# EAGLE board mach.job (EAGLE 6.1)
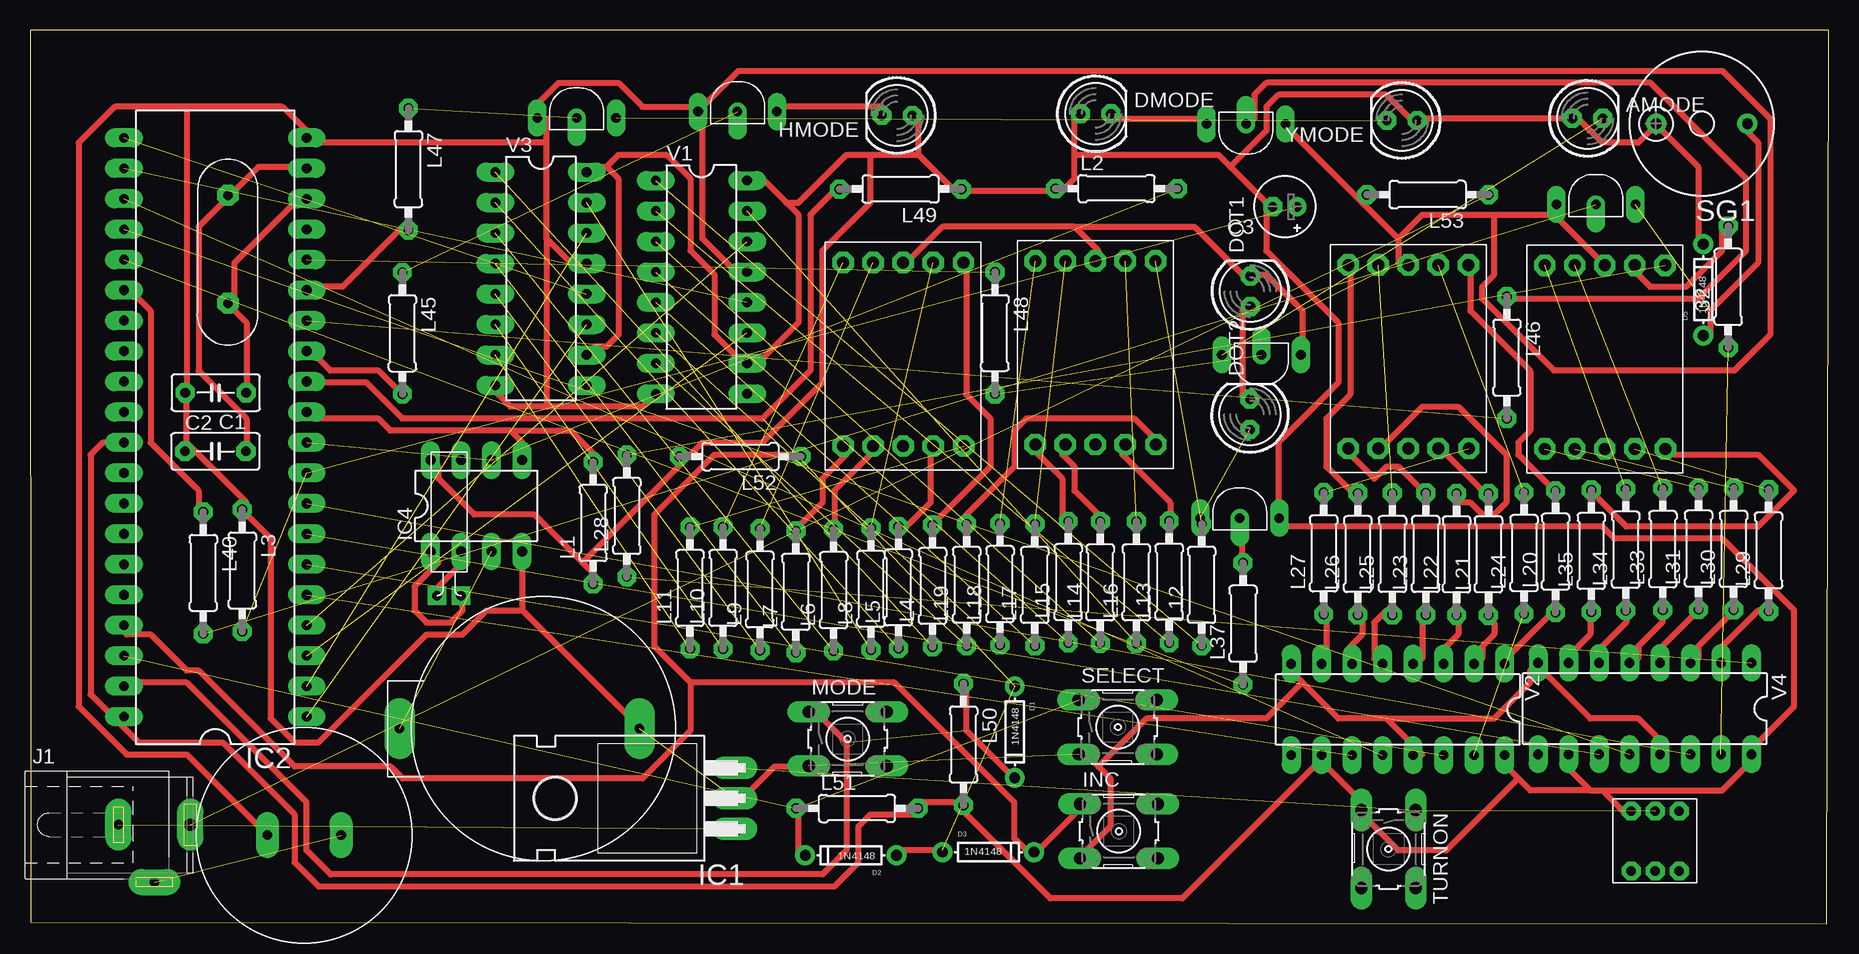
[diagram p0: board, top side]

Size 149.96 x 74.51 mm. Coordinates in mm from the lower left corner, seen from the top.
Outline: 0.05,0.1 149.75,0 149.96,74.49 0,74.51 0.05,0.1
Copper layers (1*16): Top 0.035mm / dielectric 1.5mm / Bottom 0.035mm
Design rules: minimum track width 20mil, minimum drill 20mil, track to track 10mil, track to pad 15mil, pad to pad 15mil, via to via 15mil, smd to smd 8mil, copper to edge 40mil, drill to drill 20mil, minimum pad ring 15mil, minimum via ring 8mil, stop-mask expansion 10mil, vias tented up to drill 0mil, thermal gap 40mil

## Footprints (pad centres in the part's own frame; a part is rotated, then mirrored left to right if it is on the bottom)
7SEG13X19 = drill 1 pad 1.778 octagon: P$1 5.175,7.19; P$2 2.65,7.19; P$3 0.15,7.19; P$4 -2.35,7.19; P$5 -4.85,7.19; P$6 5.201,-8.11; P$7 2.65,-8.11; P$8 0.15,-8.11; P$9 -2.35,-8.11; P$10 -4.85,-8.11
LED5MM = drill 0.813 octagon: A -1.27,0; K 1.27,0
C5B3 = drill 0.813 pad 1.6 octagon: 1 -2.54,0; 2 2.54,0
E2-5 = drill 0.813 pad 1.27: + -1.016,0 | drill 0.813 pad 1.27 octagon: - 1.016,0
DO-1N4148 = drill 0.9: A -3.81,0; C 3.81,0
TO220H = drill 1.118 long: 1 -2.54,-10.16; 2 0,-10.16; 3 2.54,-10.16 | hole 3.302: 0,4.826
DIL40 = drill 0.813 long: 1 -24.13,-7.62; 2 -21.59,-7.62; 3 -19.05,-7.62; 4 -16.51,-7.62; 5 -13.97,-7.62; 6 -11.43,-7.62; 7 -8.89,-7.62; 8 -6.35,-7.62; 9 -3.81,-7.62; 10 -1.27,-7.62; 11 1.27,-7.62; 12 3.81,-7.62; 13 6.35,-7.62; 14 8.89,-7.62; 15 11.43,-7.62; 16 13.97,-7.62; 17 16.51,-7.62; 18 19.05,-7.62; 19 21.59,-7.62; 20 24.13,-7.62; 21 24.13,7.62; 22 21.59,7.62; 23 19.05,7.62; 24 16.51,7.62; 25 13.97,7.62; 26 11.43,7.62; 27 8.89,7.62; 28 6.35,7.62; 29 3.81,7.62; 30 1.27,7.62; 31 -1.27,7.62; 32 -3.81,7.62; 33 -6.35,7.62; 34 -8.89,7.62; 35 -11.43,7.62; 36 -13.97,7.62; 37 -16.51,7.62; 38 -19.05,7.62; 39 -21.59,7.62; 40 -24.13,7.62
DIL08 = drill 0.813 long: 1 -3.81,-3.81; 2 -1.27,-3.81; 3 1.27,-3.81; 4 3.81,-3.81; 5 3.81,3.81; 6 1.27,3.81; 7 -1.27,3.81; 8 -3.81,3.81
B3F-10XX = drill 1.016 long: 1 -3.251,2.261; 2 3.251,2.261; 3 -3.251,-2.261; 4 3.251,-2.261
SPC4077 = drill 0.8 pad 2.184 long: 1 -3,0; 2 0,-4.8 | drill 1 pad 2.184 long: 3 3,0
0207/10 = drill 0.813 octagon: 1 -5.08,0; 2 5.08,0
BMT1205XH7.5 = drill 0.9 pad 1.5: + 3.8,0; - -3.8,0
PINCMOS3VCR23 = drill 0.8 pad 2.54 long: P$1 0,8; P$2 0,-12
XTAL32KHZMINI = drill 0.8 square: P$1 0.5,-12; P$2 2.5,-12
XTAL12MHZ = drill 0.8 pad 1.778 octagon: P$1 9.5,-2.5; P$2 0.5,-2.5
PUSKLOCKBUTTON = drill 0.8 pad 1.422 octagon: P$1 5.04,0; P$2 3.04,0; P$3 1.04,0; P$4 1.04,-5; P$5 3.04,-5; P$6 5.04,-5
C9014 = drill 0.8 long: P$1 -1.04,1; P$3 5.54,1 | drill 0.8 offset: P$2 2.25,1
9VBATERYJACK = drill 0.8 pad 1.93 long: P$1 -3.08,0; P$2 3.08,0
DIL16 = drill 0.813 long: 1 -8.89,-3.81; 2 -6.35,-3.81; 3 -3.81,-3.81; 4 -1.27,-3.81; 5 1.27,-3.81; 6 3.81,-3.81; 7 6.35,-3.81; 8 8.89,-3.81; 9 8.89,3.81; 10 6.35,3.81; 11 3.81,3.81; 12 1.27,3.81; 13 -1.27,3.81; 14 -3.81,3.81; 15 -6.35,3.81; 16 -8.89,3.81

## Placement (x,y rotation side)
7SEG1  7SEG13X19 common Katot  [7SEG13X19]  72.64,47.93 0 top
7SEG2  7SEG13X19 common Katot  [7SEG13X19]  88.65,48.06 0 top
7SEG3  7SEG13X19 common Katot  [7SEG13X19]  114.74,47.72 0 top
7SEG4  7SEG13X19 common Katot  [7SEG13X19]  131.12,47.7 0 top
AMODE  Blue  [LED5MM]  129.84,67.14 0 top
C1  33p  [C5B3]  15.48,44.26 180 top
C2  33p  [C5B3]  15.46,39.37 0 top
C3  10uF  [E2-5]  104.61,59.77 180 top
D1  1N4148  [DO-1N4148]  82.08,15.97 270 top
D2  1N4148  [DO-1N4148]  68.43,5.69 180 top
D3  1N4148  [DO-1N4148]  79.88,5.96 0 top
D5  1N4148  [DO-1N4148]  139.47,52.85 90 top
DMODE  Blue  [LED5MM]  88.83,67.52 0 top
DOT1  Red  [LED5MM]  101.73,52.72 90 top
DOT2  Red  [LED5MM]  101.7,42.45 90 top
HMODE  Blue  [LED5MM]  72.28,67.38 180 top
IC1  7805T  [TO220H]  48.6,10.44 90 top
IC2  AT89C51-12PC  [DIL40]  15.45,41.38 90 top
IC4  ds1307  [DIL08]  37.2,34.83 0 top
INC  button  [B3F-10XX]  90.76,7.7 0 top
J1  jack dc  [SPC4077]  10.37,8.25 0 top
L1  10K  [0207/10]  46.94,33.4 90 top
L2  10K  [0207/10]  90.57,61.28 0 top
L3  8k2  [0207/10]  17.69,29.44 270 top
L4  450  [0207/10]  75.24,28.16 90 top
L5  450  [0207/10]  72.39,28.03 90 top
L6  450  [0207/10]  66.99,27.8 90 top
L7  450  [0207/10]  63.84,27.66 90 top
L8  450  [0207/10]  70.1,27.91 90 top
L9  450  [0207/10]  60.85,27.85 90 top
L10  450  [0207/10]  57.77,27.98 90 top
L11  450  [0207/10]  55.01,27.98 90 top
L12  450  [0207/10]  97.67,28.25 90 top
L13  450  [0207/10]  94.96,28.49 90 top
L14  450  [0207/10]  89.21,28.45 90 top
L15  450  [0207/10]  86.54,28.47 90 top
L16  450  [0207/10]  92.22,28.45 90 top
L17  450  [0207/10]  83.76,28.24 90 top
L18  450  [0207/10]  80.86,28.3 90 top
L19  450  [0207/10]  78.08,28.24 90 top
L20  450  [0207/10]  127.16,31.01 90 top
L21  450  [0207/10]  121.58,30.79 90 top
L22  450  [0207/10]  118.91,30.79 90 top
L23  450  [0207/10]  116.35,30.81 90 top
L24  450  [0207/10]  124.54,30.89 90 top
L25  450  [0207/10]  113.57,30.81 90 top
L26  450  [0207/10]  110.68,30.81 90 top
L27  450  [0207/10]  107.84,30.87 90 top
L28  450  [0207/10]  49.75,33.99 90 top
L29  450  [0207/10]  144.92,31.12 90 top
L30  450  [0207/10]  142.01,31.23 90 top
L31  450  [0207/10]  139.09,31.25 90 top
L32  450  [0207/10]  141.55,53.09 90 top
L33  450  [0207/10]  136.11,31.22 90 top
L34  450  [0207/10]  133.01,31.17 90 top
L35  450  [0207/10]  130.14,31.07 90 top
L37  180K  [0207/10]  101.12,25 90 top
L40  220K  [0207/10]  14.44,29.25 270 top
L45  330K  [0207/10]  31.04,49.22 270 top
L46  330K  [0207/10]  123.11,47.19 270 top
L47  330K  [0207/10]  31.54,62.9 270 top
L48  330K  [0207/10]  80.43,49.24 270 top
L49  10K  [0207/10]  72.56,61.24 180 top
L50  10K  [0207/10]  77.82,14.93 270 top
L51  10K  [0207/10]  68.93,9.61 0 top
L52  10K  [0207/10]  59.2,38.94 180 top
L53  15  [0207/10]  116.5,60.78 180 top
MODE  button  [B3F-10XX]  68.16,15.4 0 top
SELECT  button  [B3F-10XX]  90.68,16.38 0 top
SG1  buzzer 5V  [BMT1205XH7.5]  139.36,66.69 180 top
TURNON  button  [B3F-10XX]  113.24,6.21 270 top
U$1  PINCMOS3VCR23  [PINCMOS3VCR23]  42.8,16.24 270 top
U$2  XTAL32KHZMINI  [XTAL32KHZMINI]  33.42,39.34 0 top
U$5  XTAL12MHZ  [XTAL12MHZ]  14,51.23 90 top
U$7  lock button down  [PUSKLOCKBUTTON]  132.43,9.39 0 top
U$8  C9014  [C9014]  128.28,58.96 0 top
U$9  C9014  [C9014]  103.61,67.67 180 top
U$10  C9014  [C9014]  56.72,66.7 0 top
U$11  C9014  [C9014]  43.32,66.18 0 top
U$12  C9014  [C9014]  104.9,48.42 180 top
U$13  C9014  [C9014]  98.59,32.81 0 top
U$14  9V  [9VBATERYJACK]  22.86,7.38 180 top
V1  74595N  [DIL16]  55.97,53.07 270 top
V2  74595N  [DIL16]  114.02,17.85 180 top
V3  74595N  [DIL16]  42.59,53.77 270 top
V4  74595N  [DIL16]  134.6,17.93 180 top
YMODE  Blue  [LED5MM]  114.36,66.96 180 top

## Library data of the parts
7SEG1-7SEG4 = 7seg13x19
AMODE DMODE DOT1 DOT2 HMODE YMODE = led
C1 C2 = capacitor-wima
C3 = rcl
D1-D3 D5 = microbuilder
IC1 = linear
IC2 = atmel; OC_FARNELL: unknown; OC_NEWARK: unknown
IC4 = ic-package
INC MODE SELECT TURNON = switch-omron; MPN: B3F-1000; OC_FARNELL: 176432; OC_NEWARK: 36M3542
J1 = con-jack; OC_FARNELL: unknown; OC_NEWARK: unknown
L1-L35 L37 L40 L45-L53 = resistor
SG1 = buzzer; OC_FARNELL: unknown; OC_NEWARK: unknown
U$1 = PINCMOS3VCR23
U$2 = Xtal32khzmini
U$5 = xtal12mhz
U$7 = pushlockbutton
U$8-U$13 = C9014
U$14 = 9vbateryjack
V1-V4 = 74ttl-din

## Nets
GND: 7SEG1.P$3 7SEG2.P$3 7SEG3.P$3 7SEG4.P$3 C1.2 C2.1 DOT1.K IC1.2 IC2.20 IC4.4 INC.3 L3.1 L53.2 MODE.3 SELECT.3 U$1.P$1 U$8.P$1 U$9.P$1 U$10.P$1 U$11.P$1 U$12.P$1 U$14.P$2 V1.8 V1.13 V2.8 V2.13 V3.8 V3.13 V4.8 V4.13
N$1: IC2.11 IC4.5 L1.2
N$2: IC2.10 IC4.6 L2.2
N$3: IC4.1 U$2.P$2
N$4: C3.+ IC2.9 L3.2
N$5: IC4.3 U$1.P$2
N$6: IC4.2 U$2.P$1
N$7: C2.2 IC2.19 U$5.P$1
N$8: C1.1 IC2.18 U$5.P$2
N$9: D1.C IC2.39 L50.1 MODE.1
N$10: IC2.25 L37.1
N$11: IC2.1 V3.11
N$12: IC2.2 V3.14
N$13: IC2.3 V1.11
N$14: DOT2.A U$13.P$1
N$15: IC2.5 V2.11
N$16: 7SEG1.P$4 L9.2
N$17: IC2.6 V2.14
N$18: IC2.7 V4.11
N$19: IC2.8 V4.14
N$20: L4.1 V3.1
N$21: L8.1 V3.15
N$22: 7SEG1.P$10 L7.2
N$23: L9.1 V3.5
N$24: L10.1 V3.6
N$25: 7SEG1.P$1 L4.2
N$26: L11.1 V3.7
N$27: L6.1 V3.3
N$28: L7.1 V3.4
N$29: L5.1 V3.2
N$30: DOT1.A DOT2.K
N$32: 7SEG1.P$5 L10.2
N$33: IC2.4 V1.14
N$34: 7SEG1.P$6 L11.2
N$35: IC1.1 J1.1
N$36: 7SEG2.P$10 L15.2
N$37: L13.1 V1.2
N$38: L14.1 V1.3
N$39: L15.1 V1.4
N$41: L17.1 V1.5
N$42: 7SEG2.P$5 L18.2
N$43: L18.1 V1.6
N$44: L16.1 V1.15
N$45: 7SEG2.P$2 L16.2
N$47: 7SEG2.P$7 L13.2
N$48: 7SEG2.P$9 L14.2
N$51: 7SEG2.P$6 L19.2
N$53: L37.2 U$13.P$2
N$54: 7SEG3.P$10 L23.2
N$55: L27.1 V2.7
N$56: L25.1 V2.5
N$57: L26.1 V2.6
N$58: 7SEG3.P$6 L27.2
N$59: L23.1 V2.4
N$60: L21.1 V2.2
N$61: L20.1 V2.1
N$62: L24.1 V2.15
N$63: 7SEG3.P$2 L24.2
N$64: 7SEG3.P$1 L20.2
N$65: 7SEG3.P$7 L21.2
N$66: 7SEG3.P$9 L22.2
N$67: 7SEG3.P$4 L25.2
N$68: 7SEG3.P$5 L26.2
N$69: L22.1 V2.3
N$70: 7SEG4.P$10 L31.2
N$71: L35.1 V4.7
N$72: L33.1 V4.5
N$73: L34.1 V4.6
N$74: L30.1 V4.3
N$75: L31.1 V4.4
N$76: L29.1 V4.2
N$77: L28.1 V4.1
N$78: L32.1 V4.15
N$79: 7SEG4.P$2 L32.2
N$80: 7SEG4.P$1 L28.2
N$81: 7SEG4.P$7 L29.2
N$82: 7SEG4.P$9 L30.2
N$83: 7SEG4.P$4 L33.2
N$84: 7SEG4.P$5 L34.2
N$85: 7SEG4.P$6 L35.2
N$89: IC2.26 L40.1
N$90: L40.2 U$8.P$2
N$91: L45.1 U$10.P$2
N$92: L46.1 U$9.P$2
N$93: L47.1 U$11.P$2
N$94: HMODE.K U$10.P$3
N$95: D5.A SG1.- U$8.P$3
N$96: D3.C IC2.37 INC.1 L52.1
N$97: L48.2 U$12.P$2
N$98: AMODE.K U$12.P$3
N$99: U$11.P$3 YMODE.K
N$101: DMODE.K U$9.P$3
N$105: IC2.13 L45.2
N$106: D1.A D2.A D3.A IC2.12 L49.2
N$107: IC2.14 L46.2
N$108: IC2.15 L47.2
N$109: IC2.16 L48.1
N$110: IC2.21 V3.12
N$111: IC2.22 V1.12
N$112: IC2.23 V2.12
N$113: IC2.24 V4.12
N$115: J1.3 L53.1
N$117: D2.C IC2.38 L51.1 SELECT.1
N$118: J1.2 U$14.P$1
N$120: 7SEG1.P$2 L8.2
N$121: 7SEG1.P$9 L6.2
N$123: 7SEG2.P$4 L17.2
N$124: 7SEG1.P$7 L5.2
N$127: L19.1 V1.7
N$128: L12.1 V1.1
N$129: 7SEG2.P$1 L12.2
VCC: AMODE.A C3.- D5.C DMODE.A HMODE.A IC2.31 IC2.40 IC4.8 L1.1 L2.1 L49.1 L50.2 L51.2 L52.2 SG1.+ TURNON.3 U$7.P$3 U$13.P$3 V1.10 V1.16 V2.10 V2.16 V3.10 V3.16 V4.10 V4.16 YMODE.A
VCCOUT: IC1.3 TURNON.1 U$7.P$2

## Tracks (layer width: path | path; a pad name or v marks a point on that pad's centre or on a via)
GND  (3 unrouted)
  Top 0.508: 41.05,26.1 41.05,30.1 IC4.4 | 41.05,26.1 50.05,17.1 U$1.P$1 | U$10.P$1 56.05,67.1 56.05,57.1 59.05,54.1 V1.13 | 13.05,40.1 18.05,35.1 L3.1 18.05,34.1 20.05,32.1 20.05,17.1 22.05,15.1 24.05,15.1 33.05,24.1 36.05,24.1 38.05,26.1 41.05,26.1 | 13.05,40.1 13.05,44.1 | 13.05,40.1 C2.1 | 43.05,43.1 51.05,43.1 52.05,44.1 V1.8 | 43.05,43.1 40.05,43.1 39.05,44.1 V3.8 | 43.05,57.1 43.05,65.1 | 43.05,65.1 43.05,67.1 U$11.P$1 42.05,68.1 44.05,70.1 49.05,70.1 51.05,68.1 55.05,68.1 U$10.P$1 | 43.05,57.1 45.05,55.1 46.05,55.1 V3.13 | 43.05,65.1 24.05,65.1 IC2.20 23.05,66.1 21.05,68.1 13.05,68.1 | 13.05,68.1 7.05,68.1 4.05,65.1 4.05,18.1 8.05,14.1 13.05,14.1 19.05,8.1 U$14.P$2 | 43.05,57.1 43.05,43.1 | 13.05,68.1 13.05,44.1 | 13.05,44.1 C1.2 | MODE.3 64.05,13.1 62.05,13.1 59.05,10.1 IC1.2 | V4.13 136.05,15.1 134.05,17.1 130.05,17.1 126.05,21.1 V4.8 125.05,21.1 125.05,20.1 122.05,17.1 113.05,17.1 | 89.05,13.1 88.05,14.1 SELECT.3 | 89.05,13.1 90.05,12.1 90.05,8.1 88.05,6.1 INC.3 | 106.05,20.1 109.05,17.1 113.05,17.1 | 106.05,20.1 105.05,21.1 V2.8 | 113.05,17.1 116.05,14.1 V2.13 | 89.05,13.1 93.05,17.1 103.05,17.1 106.05,20.1 | U$12.P$1 106.05,48.1 106.05,51.1 103.05,54.1 102.05,54.1 DOT1.K 101.05,54.1 97.05,58.1 87.05,58.1 | 87.05,58.1 76.05,58.1 73.05,55.1 7SEG1.P$3 | 87.05,58.1 89.05,56.1 7SEG2.P$3 | 127.05,59.1 131.05,55.1 7SEG4.P$3 | 111.05,60.1 105.05,66.1 U$9.P$1 | 114.05,57.1 114.05,55.1 7SEG3.P$3 | 111.05,60.1 114.05,57.1 | 111.05,60.1 L53.2 | 122.05,59.1 116.05,59.1 114.05,57.1 | 122.05,59.1 127.05,59.1 | 127.05,59.1 U$8.P$1 | 122.05,59.1 122.05,54.1 121.05,53.1 121.05,52.1 127.05,46.1 142.05,46.1 145.05,49.1 145.05,67.1 141.05,71.1 59.05,71.1 56.05,68.1 U$10.P$1
N$1
  Top 0.508: 40.05,41.1 30.05,41.1 29.05,42.1 24.05,42.1 IC2.11 | 40.05,41.1 41.05,40.1 41.05,39.1 IC4.5 | 40.05,41.1 45.05,41.1 47.05,39.1 L1.2
N$2  (2 unrouted)
N$3
  Top 0.508: U$2.P$2 36.05,27.1 36.05,26.1 35.05,25.1 33.05,25.1 32.05,26.1 32.05,28.1 34.05,30.1 IC4.1
N$4  (2 unrouted)
N$5  (1 unrouted)
N$6
  Top 0.508: U$2.P$1 34.05,28.1 36.05,30.1 IC4.2
N$7
  Top 0.508: IC2.19 23.05,63.1 19.05,63.1 17.05,61.1 U$5.P$1 16.05,60.1 14.05,58.1 14.05,46.1 18.05,42.1 18.05,40.1 C2.2
N$8
  Top 0.508: IC2.18 23.05,60.1 22.05,60.1 17.05,55.1 17.05,52.1 U$5.P$2 17.05,51.1 18.05,50.1 18.05,44.1 C1.1
N$9  (1 unrouted)
  Top 0.508: IC2.39 8.05,20.1 13.05,20.1 23.05,10.1 23.05,6.1 25.05,4.1 66.05,4.1 68.05,6.1 68.05,15.1 65.05,18.1 MODE.1 | L50.1 78.05,20.1 78.05,16.1 82.05,12.1 D1.C
N$10  (1 unrouted)
N$11  (1 unrouted)
N$12  (1 unrouted)
N$13  (1 unrouted)
N$14  (1 unrouted)
N$15  (1 unrouted)
N$16  (1 unrouted)
N$17  (1 unrouted)
N$18  (1 unrouted)
N$19  (1 unrouted)
N$20  (1 unrouted)
N$21  (1 unrouted)
N$22
  Top 0.508: L7.2 64.05,33.1 66.05,35.1 66.05,37.1 68.05,39.1 7SEG1.P$10
N$23  (1 unrouted)
N$24  (1 unrouted)
N$25
  Top 0.508: L4.2 75.05,33.1 80.05,38.1 80.05,42.1 78.05,44.1 78.05,55.1 7SEG1.P$1
N$26  (1 unrouted)
N$27  (1 unrouted)
N$28  (1 unrouted)
N$29  (1 unrouted)
N$30
  Top 0.508: DOT2.K 101.05,44.1 101.05,51.1 DOT1.A
N$32  (1 unrouted)
N$33  (1 unrouted)
N$34  (1 unrouted)
N$35  (1 unrouted)
N$36
  Top 0.508: L15.2 86.05,34.1 86.05,37.1 84.05,39.1 7SEG2.P$10
N$37  (1 unrouted)
N$38  (1 unrouted)
N$39  (1 unrouted)
N$41  (1 unrouted)
N$42  (1 unrouted)
N$43  (1 unrouted)
N$44  (1 unrouted)
N$45  (1 unrouted)
N$47
  Top 0.508: L13.2 95.05,34.1 95.05,35.1 91.05,39.1 7SEG2.P$7
N$48
  Top 0.508: L14.2 89.05,34.1 87.05,36.1 87.05,38.1 86.05,39.1 7SEG2.P$9
N$51
  Top 0.508: L19.2 78.05,34.1 82.05,38.1 82.05,41.1 83.05,42.1 92.05,42.1 94.05,40.1 7SEG2.P$6
N$53
  Top 0.508: U$13.P$2 101.05,33.1 101.05,30.1 L37.2
N$54
  Top 0.508: L23.2 116.05,36.1 114.05,38.1 113.05,38.1 112.05,37.1 110.05,39.1 7SEG3.P$10
N$55
  Top 0.508: V2.7 108.05,22.1 108.05,25.1 L27.1
N$56
  Top 0.508: V2.5 112.05,22.1 112.05,25.1 113.05,26.1 L25.1
N$57
  Top 0.508: V2.6 110.05,22.1 110.05,23.1 111.05,24.1 111.05,25.1 L26.1
N$58  (1 unrouted)
N$59
  Top 0.508: V2.4 116.05,22.1 116.05,25.1 L23.1
N$60
  Top 0.508: V2.2 121.05,22.1 121.05,23.1 122.05,24.1 122.05,25.1 L21.1
N$61
  Top 0.508: V2.1 123.05,22.1 127.05,26.1 L20.1
N$62  (1 unrouted)
N$63  (1 unrouted)
N$64
  Top 0.508: L20.2 127.05,36.1 124.05,39.1 124.05,40.1 125.05,41.1 125.05,46.1 120.05,51.1 120.05,54.1 7SEG3.P$1
N$65
  Top 0.508: L21.2 121.05,36.1 118.05,39.1 7SEG3.P$7
N$66
  Top 0.508: L22.2 119.05,35.1 120.05,35.1 121.05,34.1 122.05,34.1 123.05,35.1 123.05,39.1 119.05,43.1 116.05,43.1 113.05,40.1 7SEG3.P$9
N$67  (1 unrouted)
N$68
  Top 0.508: L26.2 110.05,36.1 108.05,38.1 108.05,42.1 110.05,44.1 110.05,54.1 7SEG3.P$5
N$69
  Top 0.508: V2.3 118.05,22.1 118.05,23.1 119.05,24.1 119.05,25.1 L22.1
N$70  (1 unrouted)
N$71
  Top 0.508: V4.7 128.05,22.1 130.05,24.1 130.05,26.1 L35.1
N$72
  Top 0.508: V4.5 134.05,22.1 134.05,23.1 136.05,25.1 136.05,26.1 L33.1
N$73
  Top 0.508: V4.6 131.05,22.1 131.05,23.1 133.05,25.1 133.05,26.1 L34.1
N$74
  Top 0.508: V4.3 139.05,22.1 139.05,23.1 142.05,26.1 L30.1
N$75
  Top 0.508: V4.4 136.05,22.1 136.05,23.1 139.05,26.1 L31.1
N$76
  Top 0.508: V4.2 141.05,22.1 141.05,23.1 144.05,26.1 145.05,26.1 L29.1
N$77  (1 unrouted)
N$78  (1 unrouted)
N$79
  Top 0.508: L32.2 141.05,58.1 141.05,56.1 138.05,53.1 135.05,53.1 134.05,54.1 7SEG4.P$2
N$80  (1 unrouted)
N$81  (1 unrouted)
N$82  (1 unrouted)
N$83  (1 unrouted)
N$84  (1 unrouted)
N$85
  Top 0.508: L35.2 130.05,36.1 133.05,33.1 144.05,33.1 147.05,36.1 144.05,39.1 137.05,39.1 7SEG4.P$6
N$89
  Top 0.508: L40.1 14.05,34.1 14.05,36.1 10.05,40.1 10.05,51.1 8.05,53.1 IC2.26
N$90  (1 unrouted)
N$91  (1 unrouted)
N$92
  Top 0.508: U$9.P$2 102.05,67.1 102.05,69.1 103.05,70.1 135.05,70.1 143.05,62.1 143.05,56.1 139.05,52.1 123.05,52.1 L46.1
N$93  (1 unrouted)
N$94
  Top 0.508: U$10.P$3 62.05,68.1 71.05,68.1 HMODE.K
N$95  (1 unrouted)
  Top 0.508: D5.A 140.05,49.1 140.05,51.1 144.05,55.1 144.05,65.1 143.05,66.1 SG1.-
N$96
  Top 0.508: 55.05,20.1 52.05,23.1 52.05,34.1 57.05,39.1 64.05,39.1 L52.1 | 55.05,20.1 72.05,20.1 82.05,10.1 82.05,7.1 83.05,6.1 D3.C 84.05,6.1 87.05,9.1 INC.1 | 55.05,20.1 55.05,16.1 51.05,12.1 31.05,12.1 30.05,13.1 22.05,13.1 14.05,21.1 13.05,21.1 10.05,24.1 8.05,24.1 IC2.37
N$97  (1 unrouted)
N$98  (1 unrouted)
N$99  (1 unrouted)
N$101
  Top 0.508: U$9.P$3 98.05,67.1 90.05,67.1 DMODE.K
N$105
  Top 0.508: IC2.13 24.05,47.1 25.05,46.1 29.05,46.1 31.05,44.1 L45.2
N$106  (2 unrouted)
  Top 0.508: IC2.12 24.05,45.1 28.05,45.1 31.05,42.1 61.05,42.1 65.05,46.1 65.05,59.1 67.05,61.1 L49.2 | D2.A 72.05,6.1 76.05,6.1 D3.A
N$107  (1 unrouted)
N$108
  Top 0.508: IC2.15 24.05,53.1 26.05,53.1 31.05,58.1 L47.2
N$109  (1 unrouted)
N$110  (1 unrouted)
N$111  (1 unrouted)
N$112  (1 unrouted)
N$113  (1 unrouted)
N$115  (1 unrouted)
N$117  (2 unrouted)
  Top 0.508: L51.1 64.05,9.1 64.05,6.1 D2.C
N$118  (1 unrouted)
N$120  (1 unrouted)
N$121
  Top 0.508: L6.2 67.05,33.1 67.05,36.1 70.05,39.1 7SEG1.P$9
N$123  (1 unrouted)
N$124
  Top 0.508: L5.2 73.05,33.1 75.05,35.1 75.05,39.1 7SEG1.P$7
N$127  (1 unrouted)
N$128  (1 unrouted)
N$129  (1 unrouted)
VCC
  Top 0.508: 74.05,64.1 74.05,67.1 HMODE.A | 74.05,64.1 77.05,61.1 L49.1 78.05,61.1 85.05,61.1 L2.1 86.05,61.1 87.05,62.1 87.05,64.1 | 87.05,64.1 87.05,67.1 DMODE.A | 100.05,63.1 99.05,64.1 87.05,64.1 | 100.05,63.1 103.05,60.1 | 103.05,60.1 103.05,56.1 109.05,50.1 109.05,45.1 104.05,40.1 104.05,34.1 U$13.P$3 104.05,33.1 131.05,33.1 132.05,32.1 141.05,32.1 147.05,26.1 147.05,18.1 144.05,15.1 V4.16 143.05,14.1 143.05,13.1 141.05,11.1 131.05,11.1 | 103.05,60.1 C3.- | 63.05,60.1 61.05,62.1 60.05,62.1 V1.16 | 63.05,60.1 64.05,59.1 64.05,50.1 61.05,47.1 60.05,47.1 V1.10 59.05,47.1 57.05,49.1 57.05,54.1 55.05,56.1 55.05,62.1 53.05,64.1 49.05,64.1 48.05,63.1 | 70.05,64.1 68.05,64.1 64.05,60.1 63.05,60.1 | 70.05,64.1 74.05,64.1 | D5.C 139.05,57.1 139.05,63.1 136.05,66.1 SG1.+ 135.05,66.1 134.05,65.1 131.05,65.1 129.05,67.1 AMODE.A 128.05,67.1 116.05,67.1 YMODE.A 115.05,67.1 113.05,69.1 104.05,69.1 103.05,68.1 103.05,66.1 100.05,63.1 | 46.05,30.1 47.05,29.1 L1.1 | 46.05,30.1 42.05,34.1 37.05,34.1 34.05,37.1 34.05,38.1 IC4.8 | 54.05,38.1 54.05,39.1 L52.2 | 46.05,30.1 54.05,38.1 | 70.05,64.1 70.05,60.1 66.05,56.1 66.05,45.1 61.05,40.1 56.05,40.1 54.05,38.1 | 48.05,63.1 49.05,62.1 49.05,49.1 48.05,48.1 47.05,48.1 V3.10 | 48.05,63.1 47.05,63.1 V3.16 | 131.05,11.1 133.05,9.1 U$7.P$3 | 130.05,11.1 131.05,11.1 | 130.05,11.1 128.05,13.1 128.05,14.1 V4.10 | 124.05,12.1 125.05,11.1 130.05,11.1 | 124.05,12.1 123.05,13.1 V2.16 | 124.05,12.1 118.05,6.1 114.05,6.1 111.05,9.1 TURNON.3 111.05,10.1 108.05,13.1 V2.10 107.05,13.1 96.05,2.1 85.05,2.1 78.05,9.1 L50.2 77.05,10.1 74.05,10.1 L51.2 74.05,9.1 70.05,9.1 69.05,8.1 69.05,5.1 67.05,3.1 24.05,3.1 22.05,5.1 22.05,9.1 16.05,15.1 9.05,15.1 7.05,17.1
  Top 0.508: 7.05,17.1 5.05,19.1 5.05,39.1 6.05,40.1 7.05,40.1 IC2.31 | 7.05,17.1 IC2.40
VCCOUT  (2 unrouted)